# Altium PCB DCmeter.PcbDoc
Units mm, origin at the board's own origin, x right, y up, seen from the top; angles counter-clockwise.
Board outline 34 x 25 mm, 2 copper layers (Top Layer, Bottom Layer); 41 components, 28 nets, 128 pads, 0 vias.
Unrouted connection lines stored in the file: 84.
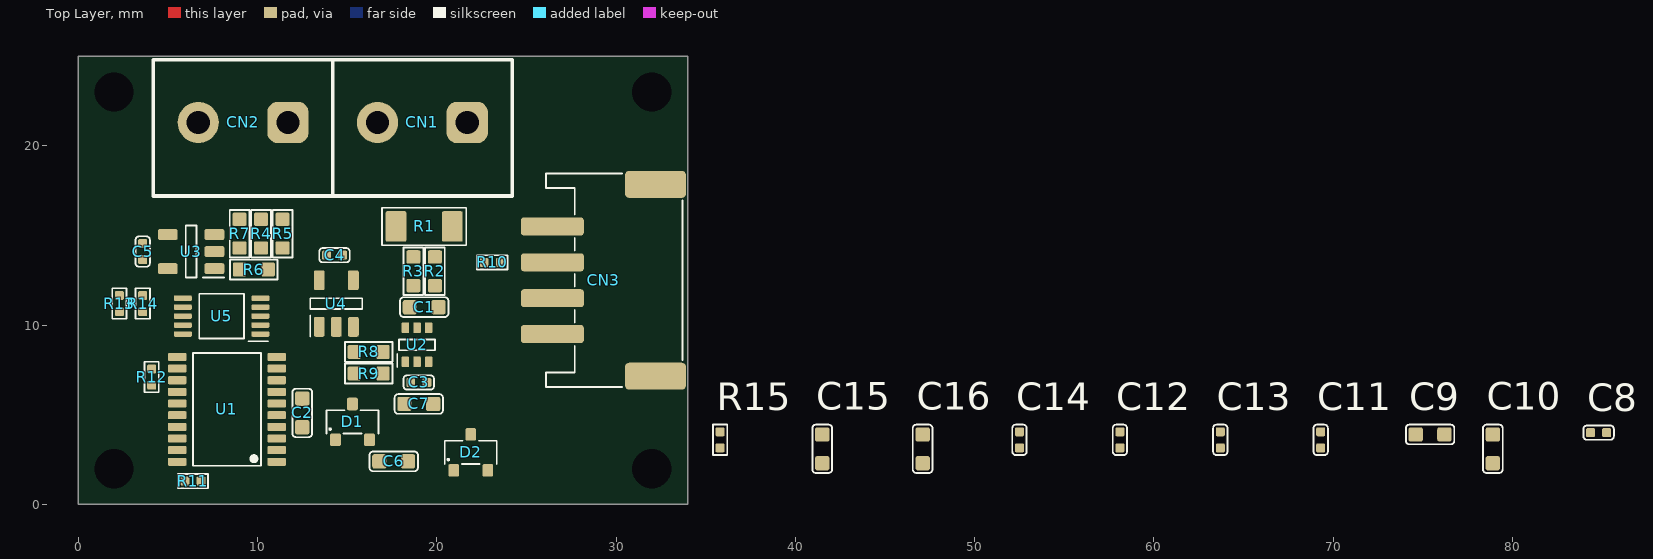
[diagram p0: Top Layer view]
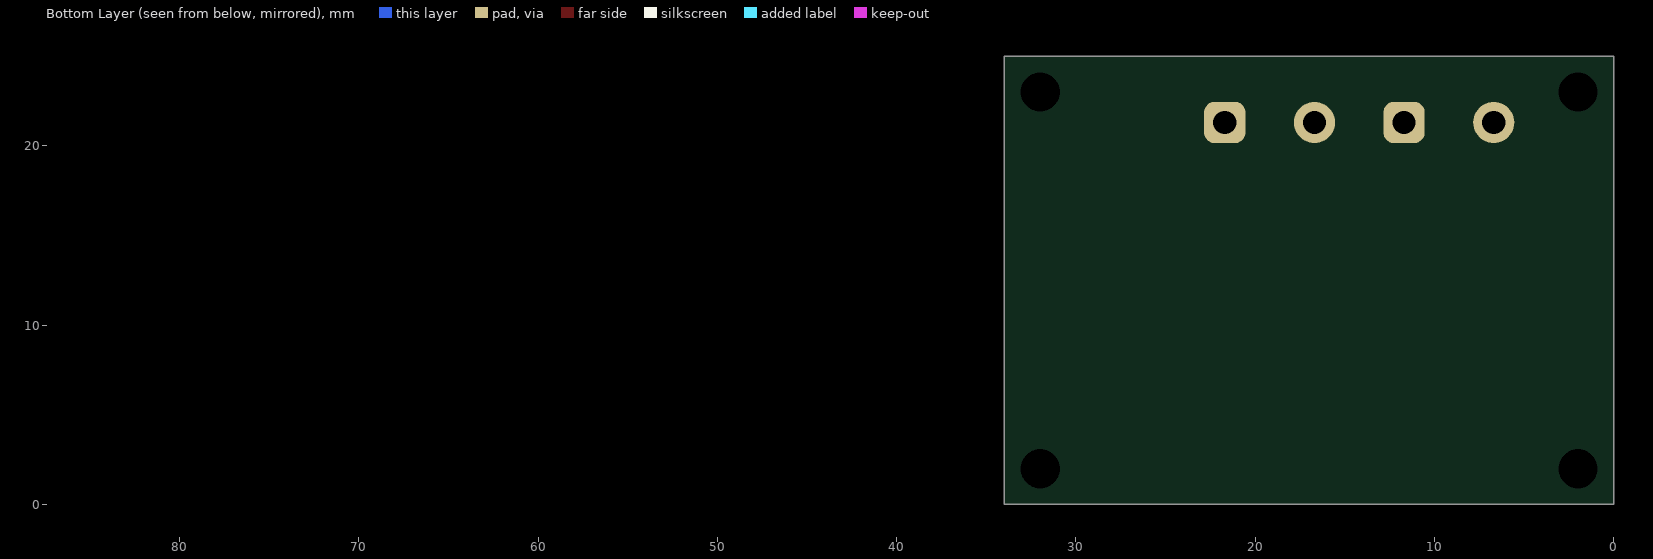
[diagram p1: Bottom Layer view, seen from below]

## Layer stack, top to bottom
Top Solder: solder mask 0.0102, Solder Resist, Dk 3.5
Top Layer: signal copper 0.0356
Dielectric 1: dielectric 0.32, FR-4, Dk 4.8
Bottom Layer: signal copper 0.0356
Bottom Solder: solder mask 0.0102, Solder Resist, Dk 3.5

## Board outline
0,0 0,25 34,25 34,0

## Design rules (kind name [scope] priority, off if disabled: settings)
Clearance [All] p1: gap=0.2 ignorepadtopadclearanceinfootprint=FALSE
ComponentClearance ComponentClearance_CN [InComponent('CN1') vs InComponent('CN2')] p1: gap=0 collisioncheckmode=3 verticalgap=0 showdistances=FALSE donotcheckwithout3dbody=TRUE
ComponentClearance [All] p2: gap=0.254 collisioncheckmode=3 verticalgap=0.254 showdistances=FALSE
PlaneClearance [All] p1: clearance=0.3
PlaneConnect [All] p1: planeconnectstyle=Direct reliefexpansion=0.508 reliefentries=4 reliefconductorwidth=0.254 reliefairgap=0.254
PolygonConnect [All] p1: connectstyle=Direct reliefconductorwidth=0.254 reliefentries=4 polygonreliefangle="90 Angle" airgapwidth=0.254
RoutingVias [All] p1: holewidth=0.3 width=0.5 viastyle="Through Hole" minholewidth=0.3 minwidth=0.5 maxholewidth=0.3 maxwidth=0.5
SolderMaskExpansion SolderMaskExpansion_Via [IsVia] p1: expansion=0.102 istentingtop=TRUE
SolderMaskExpansion [All] p2: expansion=0.05 istentingtop=FALSE
Width [All] p1: maxlimit=2 minlimit=0.254 preferedwidth=0.254
27 further rules are at their usual default settings.

## Components (designator, comment, footprint, x,y, rotation, side; value= is the part's Value field where it differs from the comment)
C1 "1u" CAP_0603 19.3,11 r180 top
C2 "1u" CAP_0603 12.5,5.1 r90 top
C3 "1u" CAP_0402 19,6.8 r180 top
C4 "1u" CAP_0402 14.3,13.9 r0 top
C5 "1u" CAP_0402 3.6,14.1 r90 top
C6 "10u" CAP_0603 17.6,2.4 r180 top
C7 "10u" CAP_0603 19,5.6 r180 top
C8 "1u" CAP_0402 84.8,4 r0 top
C9 "1u" CAP_0603 75.4,3.9 r0 top
C10 "1u" CAP_0603 78.9,3.1 r90 top
C11 "22P" CAP_0402 69.3,3.6 r90 top
C12 "1u" CAP_0402 58.1,3.6 r90 top
C13 "1u" CAP_0402 63.7,3.6 r90 top
C14 "6P8" CAP_0402 52.5,3.6 r90 top
C15 "10u" CAP_0603 41.5,3.1 r90 top
C16 "10u" CAP_0603 47.1,3.1 r90 top
CN1 "TB002-500-02BE" TB002-500-02BE 19.2,21 r180 top locked
CN2 "NC/TB002-500-02BE" TB002-500-02BE 9.2,21 r180 top locked
CN3 "JST PH 4P Side Entry SMD" S4B_PH_SM4_TB 29.4,12.5 r270 top locked
D1 "BAT54S" SOT-23-3_290X130X95_95P_S 15.3,4.6 r0 top
D2 "BAT54S" SOT-23-3_290X130X95_95P_S 21.9,2.9 r0 top
R1 "40m" RES_1206 19.3,15.5 r0 top
R2 "1R" RES_0603 19.9,13 r90 top
R3 "1R" RES_0603 18.7,13 r90 top
R4 "NC/0R" RES_0603 10.2,15.1 r90 top
R5 "0R/NC" RES_0603 11.4,15.1 r90 top
R6 "1M" RES_0603 9.8,13.1 r0 top
R7 "150K" RES_0603 9,15.1 r270 top
R8 "1M" RES_0603 16.2,8.5 r0 top
R9 "680K" RES_0603 16.2,7.3 r180 top
R10 "330R" RES_0402 23.1,13.5 r180 top
R11 "330R" RES_0402 6.4,1.3 r180 top
R12 "TBD" RES_0402 4.1,7.1 r270 top
R13 "10K" RES_0402 2.3,11.2 r90 top
R14 "10K" RES_0402 3.6,11.2 r90 top
R15 "TBD" RES_0402 35.8,3.6 r90 top
U1 "STM32G030F6P6" TSSOP-20_650x440x110_65P 8.3,5.3 r90 top
U2 "INA186A1IDCK" SOT-363-6_215X130X110_65P 18.9,8.9 r0 top
U3 "TLV333IDBV" SOT-23-5_290X160X120_95P 6.3,14.1 r180 top
U4 "TLV333IDBV" SOT-23-5_290X160X120_95P 14.4,11.2 r90 top
U5 "ADS1115IDGS" MSOP-10_300x300x110_50P 8,10.5 r90 top

## Footprints (in the part's own frame and the unit in brackets; to place one, negate y for a bottom-side part, rotate by r counter-clockwise, add the part's x,y. Pads: shape width x height; smd on the part's side, far side on the other; paste and mask are expansions set on the pad)
CAP_0402 [mm] "Murata_GRM15_DT0.20mm_aLbBcL"
  rrect30% 0.5x0.5 smd: 1(-0.45,0) 2(0.45,0)
  silkscreen extent -0.85,-0.4 0.85,0.4, body extent -0.5,-0.25 0.5,0.25, height 0.55
CAP_0603 [mm] "Murata_GRM18_DT0.20mm_aMbBcL"
  rrect30% 0.8x0.8 smd: 1(-0.8,0) 2(0.8,0)
  silkscreen extent -1.35,-0.55 1.35,0.55, body extent -0.8,-0.4 0.8,0.4, height 0.9
MSOP-10_300x300x110_50P [mm] "AnalogDevice_MSOP-10_edit"
  rrect40% 0.3x1 smd mask+0.05: 1(-1,-2.163) 2(-0.5,-2.163) 3(0,-2.163) 4(0.5,-2.163) 5(1,-2.163) 6(1,2.163) 7(0.5,2.163) 8(0,2.163) 9(-0.5,2.163) 10(-1,2.163)
  silkscreen extent -1.4,-2.6 1.25,1.25, body extent -1.5,-2.45 1.5,2.45, height 1.15
RES_0402 [mm] "RES_0402"
  rrect30% 0.5x0.5 smd: 1(-0.45,0) 2(0.45,0)
  silkscreen extent -0.85,-0.4 0.85,0.4, body extent -0.5,-0.25 0.5,0.25, height 0.35
RES_0603 [mm] "RES_0603"
  rrect30% 0.75x0.8 smd: 1(-0.8,0) 2(0.8,0)
  silkscreen extent -1.33,-0.55 1.33,0.55, body extent -0.8,-0.4 0.8,0.4, height 0.45
RES_1206 [mm] "Stackpole_CSR1206"
  rrect15% 1.15x1.7 smd: 1(-1.575,0) 2(1.575,0)
  silkscreen extent -2.35,-1.05 2.35,1.05, body extent -1.51,-0.78 1.54,0.77, height 0.55
S4B_PH_SM4_TB [mm] "S4B_PH_SM4_TB"
  rrect30% 1.5x3.4 smd: 0(-5.35,2.8) 0(5.35,2.8)
  rrect30% 1x3.5 smd: 1(3,-2.95) 2(1,-2.95) 3(-1,-2.95) 4(-3,-2.95)
  silkscreen extent -5.95,-3.3 5.95,4.3, body extent -5.95,-4.3 5.95,4.3, height 5.6
SOT-23-3_290X130X95_95P_S [mm] "Nexperia_2N7002"
  rrect30% 0.6x0.7 smd: 1(-0.95,-1) 2(0.95,-1) 3(0,1)
  silkscreen extent -1.45,-0.65 1.45,0.65, body extent -1.45,-1.2 1.45,1.2, height 0.95
SOT-23-5_290X160X120_95P [mm] "TI_TLV74130PDBVR"
  rrect30% 1.1x0.6 smd: 1(-1.3,0.95) 2(-1.3,0) 3(-1.3,-0.95) 4(1.3,-0.95) 5(1.3,0.95)
  silkscreen extent -1.85,-1.45 0.3,1.45, body extent -1.4,-1.45 1.4,1.45, height 1.2
SOT-363-6_215X130X110_65P [mm] "Diodes_74LVC1T45DW-7"
  rrect30% 0.42x0.6 smd: 1(-0.65,-0.95) 2(0,-0.95) 3(0.65,-0.95) 4(0.65,0.95) 5(0,0.95) 6(-0.65,0.95)
  silkscreen extent -1.1,-1.25 1,0.3, body extent -1,-1.05 1,1.05, height 1.1
TB002-500-02BE [mm] "CUI Devices_TB002-500-02BE"
  rrect50% 2.3x2.3 hole 1.3: 1(-2.5,-0.3)
  round 2.3 hole 1.3: 2(2.5,-0.3)
  silkscreen extent -5,-3.8 5,3.8, body extent -5.5,-3.8 5,3.8, height 10
TSSOP-20_650x440x110_65P [mm] "AnalogDevices_TSSOP-20"
  rrect35% 0.45x1.05 smd mask+0.05: 1(-2.925,-2.775) 2(-2.275,-2.775) 3(-1.625,-2.775) 4(-0.975,-2.775) 5(-0.325,-2.775) 6(0.325,-2.775) 7(0.975,-2.775) 8(1.625,-2.775) 9(2.275,-2.775) 10(2.925,-2.775) 11(2.925,2.775) 12(2.275,2.775) 13(1.625,2.775) 14(0.975,2.775) 15(0.325,2.775) 16(-0.325,2.775) 17(-0.975,2.775) 18(-1.625,2.775) 19(-2.275,2.775) 20(-2.925,2.775)
  silkscreen extent -3.15,-1.9 3.15,1.9, body extent -3.25,-3.2 3.25,3.2, height 1.13

## Part data
C1 C2 C3 C4 C5 C6 C7 C8 C9 C10 C11 C12 C13 C14 C15 C16: library part Capacitor, "Capacitor", Voltage=V
CN1: "screw Terminal Block Connector Pitch 5.0mm 2 poles, CUI Devices_TB002-500-02BE"
CN2: library part TB002-500-02BE, "screw Terminal Block Connector Pitch 5.0mm 2 poles, CUI Devices_TB002-500-02BE"
CN3: library part S4B-PH-SM4-TB, "JST PH 2.0mm 4P SMD / S4B-PH-SM4-TB"
D1 D2: "Schottky Diode"
R1 R2 R3 R4 R5 R6 R7 R8 R9 R10 R11 R12 R13 R14 R15: library part Resistor, "Resistor", Voltage=V
U1: "MCU Cortex-M0+"
U2: "Current Sense Amplifier gain 25 vos 50uV"
U3 U4: "Single precision OPA"
U5: "Ultra-Small, Low-Power, I2C-Compatible, 860-SPS, 16-Bit ADCs"

## Free pads (board coordinates)
  round 0 hole 2.2 unplated: 2(2,2) 2(2,23) 2(32,2) 2(32,23)

## Nets (pads, with @x,y where several pads share a name; then routed paths per layer and width w, separated by ;. In a path a pad name is that pad's centre, name@x,y a point inside that pad or via, vN(x,y) a via of type N, cw(c..) or ccw(c..) an arc to the next point about the centre after c; other vN are vias at no path point)
3.3V: C2.1 C4.1 C5.1 D1.1 R13.2 R14.2 U1.4 U3.5 U4.5 U5.8
ADS_RDY: U1.3 U5.2
BFR_I1: C14.1 R8.1 R9.2 U4.3
BFR_I2: C11.1 R6.1 R7.2 U3.3
BFR_O1: U4.1 U4.4 U5.4
BFR_O2: U3.1 U3.4 U5.6
CP_SRC: R12.2 R15.2 U1.14
CP_V+: C3.1 C7.1 D1.2 U2.3
CP_V-: C8.1 C12.1 C13.1 C16.1 D2.1 U2.2 U3.2 U4.2
CURR_N: CN1.2 R1.1 R3.2 R5.2
CURR_P: CN1.1 R1.2 R2.2
GND: C2.2 C3.2 C4.2 C5.2 C7.2 C8.2 C9.2 C10.2 C11.2 C12.2 C13.2 C14.2 C16.2 CN2.2 CN3.0 CN3.4 D2.2 R7.1 R9.1 U1.5 U2.1 U5.1 U5.3 U5.5 U5.7
I2C2_SCL: R14.1 U1.16 U5.9
I2C2_SDA: R13.1 U1.17 U5.10
NetC6_1: C6.1 D1.3
NetC6_2: C6.2 R12.1
NetC15_1: C15.1 D2.3
NetC15_2: C15.2 R15.1
NetR4_1: R4.1 R5.1 R6.2
SEN_N: C1.2 C10.1 R3.1 U2.5
SEN_O: R8.2 U2.6
SEN_P: C1.1 C9.1 R2.1 U2.4
UART1_RX: R10.2 U1.1
UART1_RX_O: CN3.3 R10.1
UART1_TX: R11.2 U1.20
UART1_TX_O: CN3.2 R11.1
VIN: CN3.1
VOLT_P: CN2.1 R4.2
pads on no net: U1.2 U1.6 U1.7 U1.8 U1.9 U1.10 U1.11 U1.12 U1.13 U1.15 U1.18 U1.19

## Silkscreen, mask and mechanical layers (free items; w line width, h text height)
Board Shape:
  the board outline again, w0.1